# Altium PCB DUTBoard_DONT_TOUCH.PcbDoc (part 3 of 5)
Units mil, origin at the board's own origin, x right, y up, seen from the top; angles counter-clockwise.
Board outline 5475 x 5475 mil, 4 copper layers (Top Layer, Mid-Layer 1, Mid-Layer 2, Bottom Layer); 57 components, 471 nets, 1641 pads, 1070 vias.
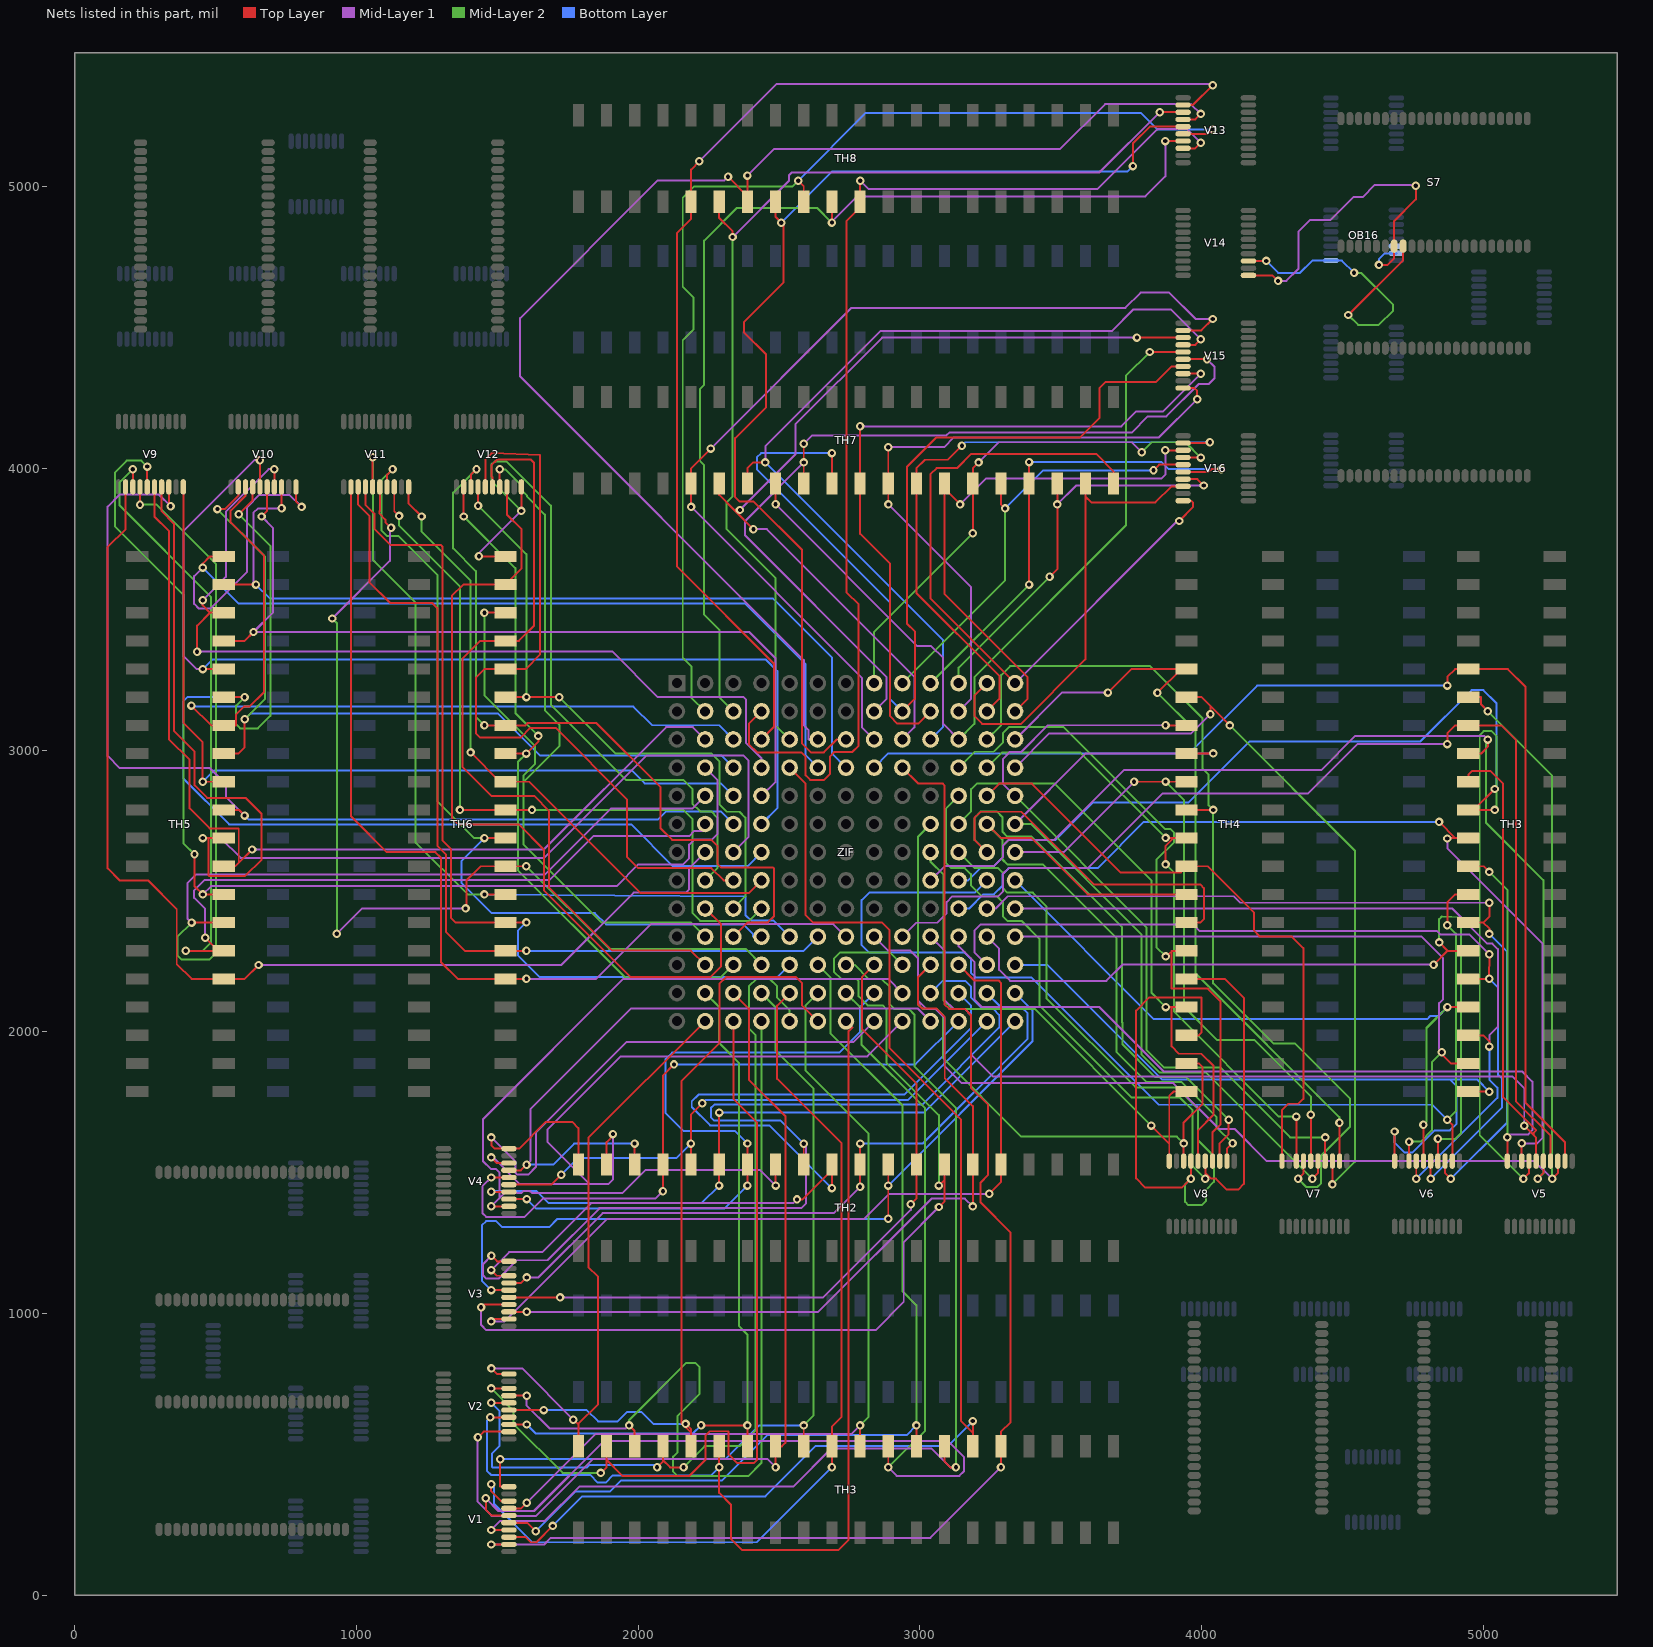
[diagram p5: the nets of this part, all layers, seen from the top]

## Via types
v1: diameter 30, hole 15, Top Layer to Bottom Layer, 1070 vias

## Nets (pads, with @x,y where several pads share a name; then routed paths per layer and width w, separated by ;. In a path a pad name is that pad's centre, name@x,y a point inside that pad or via, vN(x,y) a via of type N, cw(c..) or ccw(c..) an arc to the next point about the centre after c; other vN are vias at no path point) (continued)
INSIDE_B9: TH8.31 V13.IVCC1 ZIF.10 | length 4145.6
  Top Layer w7: ZIF.10@2437.5,3137.5 2393,3093 2393,3021 2422.5,2991.5 2579.09,2991.5 2594,2976.59 2594,2910.47 2610.47,2894 2659.53,2894 2681,2915.47 2681,2977.94 2696.06,2993 2759,2993 2782,3016 2782,3517 2740,3559 2740,4878.5 2787.5,4926 TH8.31@2787.5,4946.46 2787.5,5020.5 v1(2788,5021) ; V13.IVCC1@3933.86,5136.02 3977.02,5136.02 v1(3997,5156)
  Mid-Layer 1 w7: v1(2788,5021) 2818,4991 3629.5,4991 3842.5,5204 3949,5204 v1(3997,5156)
INSIDE_B10: TH8.30 V13.IVCC2 ZIF.11 | length 3764.8
  Top Layer w7: v1(2687.5,4872.09) TH8.30@2687.5,4946.46 ; v1(3871,5161.61) V13.IVCC2@3933.86,5161.61
  Mid-Layer 1 w7: v1(2687.5,4872.09) 2687.5,4875.5 2776.93,4964.93 3800,4964.93 3871,5035.93 v1(3871,5161.61)
  Mid-Layer 2 w7: ZIF.11@2337.5,3137.5 2288,3187 2288,3427 2234,3481 2234,4010.41 2219.35,4025.06 2219.35,4282.41 2234,4297.07 2234,4808 2350,4924 2635.59,4924 v1(2687.5,4872.09)
INSIDE_B11: TH8.29 V13.IVCC3 ZIF.12 | length 4112
  Top Layer w7: v1(2568,5021) 2587.5,5001.5 TH8.29@2587.5,4946.46 ; V13.IVCC3@3933.86,5187.2 4023.2,5187.2 v1(4039,5203)
  Mid-Layer 2 w7: ZIF.12@2237.5,3137.5 2189,3186 2189,3297 2158,3328 2158,4454 2197,4493 2197,4605 2158,4644 2158,4960 2199,5001 2548,5001 v1(2568,5021)
  Bottom Layer w7: v1(2568,5021) 2808.3,5261.3 3784.5,5261.3 3842.8,5203 v1(4039,5203)
INSIDE_B12: TH8.28 V13.IVCC4 ZIF.13 | length 4000.6
  Top Layer w7: TH8.28@2487.5,4946.46 2487.5,4892 v1(2507.5,4872) 2516,4863.5 2516,4660 2376,4520 2376,4482 2454,4404 2454,4217 2344,4107 2344,3898 2360,3882 2410,3882 2582,3710 2582,3023 2613,2992 2659,2992 2704.5,3037.5 ZIF.13@2737.5,3037.5 ; v1(3756,5073) 3756,5153 3815.8,5212.8 V13.IVCC4@3933.86,5212.8
  Bottom Layer w7: v1(2507.5,4872) 2689.5,5054 3737,5054 v1(3756,5073)
INSIDE_B13: TH8.27 V13.IVCC5 ZIF.14 | length 4888.7
  Top Layer w7: v1(2318.75,5034.75) TH8.27@2387.5,4966 ; TH8.27@2387.5,4946.46 TH8.27@2387.5,4966 ; v1(2387.5,5039) TH8.27@2387.5,4966 ; V13.IVCC5@3933.86,5238.39 3977.39,5238.39 v1(3997,5258)
  Mid-Layer 1 w7: v1(2318.75,5034.75) 2305.84,5021.84 2069.45,5021.84 1581.07,4533.46 1581.07,4325.93 2588,3319 2588,3088 2604,3072 2604,3037.5 ZIF.14@2637.5,3037.5 ; v1(2387.5,5039) 2481.5,5133 3497,5133 3657,5293 3962,5293 v1(3997,5258)
INSIDE_B14: TH8.26 V13.IVCC6 ZIF.15 | length 3824.5
  Top Layer w7: TH8.26@2287.5,4946.46 2287.5,4888.5 2335,4841 v1(2335,4821) ; v1(3850.98,5263.98) V13.IVCC6@3933.86,5263.98
  Mid-Layer 1 w7: v1(2335,4821) 2535.14,5021.14 2535.14,5040 2545.14,5050 3637,5050 v1(3850.98,5263.98)
  Mid-Layer 2 w7: v1(2335,4821) 2335,3900.5 2312.5,3878 2312.5,3785.5 2488,3610 2488,3087 ZIF.15@2537.5,3037.5
INSIDE_B15: TH8.25 V13.IVCC7 ZIF.16 | length 4317.3
  Top Layer w7: v1(2217,5090) 2187.5,5060.5 TH8.25@2187.5,4946.46 2187.5,4885.5 2138,4836 2138,3651 2482,3307 2482,3082 ZIF.16@2437.5,3037.5 ; V13.IVCC7@3933.86,5289.57 3968.57,5289.57 v1(4039,5360)
  Mid-Layer 1 w7: v1(2217,5090) 2490.66,5363.66 4035.34,5363.66 v1(4039,5360)
INSIDE_B16: TH7.40 V16.IVCC0 ZIF.17 | length 2558.4
  Top Layer w7: ZIF.17@3337.5,3237.5 3038,3537 3038,3980 3059,4001 3131.5,4001 3181.5,4051 3625,4051 3687.5,3988.5 TH7.40@3687.5,3946.46 ; v1(3920,3813) 3970,3863 3970,3877 3962.16,3884.84 V16.IVCC0@3933.86,3884.84
  Mid-Layer 1 w7: ZIF.17@3337.5,3237.5 3913,3813 v1(3920,3813)
INSIDE_B17: TH7.39 V16.IVCC1 ZIF.18 | length 1638.5
  Top Layer w7: ZIF.18@3237.5,3237.5 3194,3194 3194,3120 3221,3093 3359,3093 3587.5,3321.5 3587.5,3900 ; TH7.39@3587.5,3946.46 3587.5,3900 ; V16.IVCC1@3933.86,3936.02 3893,3936.02 3835.98,3879 3608.5,3879 3587.5,3900
INSIDE_B18: TH7.38 V16.IVCC2 ZIF.19 | length 1483.7
  Top Layer w7: v1(3460,3615) 3487.5,3642.5 v1(3487.5,3872) TH7.38@3487.5,3946.46 ; V16.IVCC2@3933.86,3961.61 3984.39,3961.61 v1(4007,3939)
  Mid-Layer 1 w7: v1(3487.5,3872) 3554.5,3939 v1(4007,3939)
  Mid-Layer 2 w7: ZIF.19@3137.5,3237.5 3137.5,3292.5 v1(3460,3615)
INSIDE_B19: TH7.37 V16.IVCC3 ZIF.20 | length 1762.5
  Top Layer w7: v1(3387.5,3587.5) TH7.37@3387.5,3946.46 v1(3387.5,4022) ; V16.IVCC3@3933.86,3987.2 4025,3987.2 4034.8,3997 v1(4070,3997)
  Mid-Layer 2 w7: ZIF.20@3037.5,3237.5 v1(3387.5,3587.5)
  Bottom Layer w7: v1(3387.5,4022) 3858,4022 3883,3997 v1(4070,3997)
INSIDE_B20: TH7.36 V16.IVCC4 ZIF.21 | length 1562.1
  Top Layer w7: TH7.36@3287.5,3946.46 3287.5,3872 v1(3302,3857.5) ; v1(3829,3993) 3848.8,4012.8 V16.IVCC4@3933.86,4012.8
  Mid-Layer 2 w7: ZIF.21@2937.5,3237.5 3302,3602 v1(3302,3857.5)
  Bottom Layer w7: v1(3302,3857.5) 3437.5,3993 v1(3829,3993)
INSIDE_B21: TH7.35 V16.IVCC5 ZIF.22 | length 1870.9
  Top Layer w7: v1(3187.5,3769.5) TH7.35@3187.5,3946.46 3187.5,4000.5 v1(3208,4021) ; V16.IVCC5@3933.86,4038.39 3996.61,4038.39 v1(3997,4038)
  Mid-Layer 1 w7: v1(3208,4021) 3279.5,4092.5 3751.5,4092.5 v1(3787,4057)
  Mid-Layer 2 w7: ZIF.22@2837.5,3237.5 2837.5,3419.5 v1(3187.5,3769.5) ; v1(3787,4057) 3822.5,4092.5 3942.5,4092.5 v1(3997,4038)
INSIDE_B22: TH7.34 V16.IVCC6 ZIF.23 | length 1947.7
  Top Layer w7: TH7.34@3087.5,3946.46 TH7.34@3087.5,3927 ; v1(3142.5,3872) TH7.34@3087.5,3927 ; ZIF.23@3337.5,3137.5 3381,3181 3381,3259.53 3087.5,3553.03 TH7.34@3087.5,3927 ; v1(3871,4064) V16.IVCC6@3933.86,4063.98
  Mid-Layer 1 w7: v1(3142.5,3872) 3234.8,3964.3 3857.48,3964.3 3871,3977.82 v1(3871,4064)
INSIDE_B23: TH7.33 V16.IVCC7 ZIF.24 | length 2180
  Top Layer w7: v1(3149,4080) 3099.46,4030.46 3017.96,4030.46 2987.5,4000 TH7.33@2987.5,3946.46 2987.5,3557.5 3282,3263 3282,3182 ZIF.24@3237.5,3137.5 ; V16.IVCC7@3933.86,4089.57 4026.5,4089.57 v1(4029.43,4092.5)
  Bottom Layer w7: v1(3149,4080) 3161.5,4092.5 v1(4029.43,4092.5)
INSIDE_B24: TH7.32 V15.IVCC0 ZIF.25 | length 2329.1
  Top Layer w7: v1(2887.5,4075) TH7.32@2887.5,3946.46 2887.5,3872.5 v1(2888,3872) ; V15.IVCC0@3933.86,4284.84 3974.16,4284.84 3984,4275 v1(3984,4245)
  Mid-Layer 1 w7: v1(2887.5,4075) 3086,4075 3120.5,4109.5 3848.5,4109.5 v1(3984,4245) ; v1(2888,3872) 3182,3578 3182,3182 ZIF.25@3137.5,3137.5
INSIDE_B25: TH7.31 V15.IVCC1 ZIF.26 | length 2595.5
  Top Layer w7: v1(2787.5,4149) TH7.31@2787.5,3946.46 2787.5,3767 2894,3660.5 2894,3120 2920,3094 2994,3094 ZIF.26@3037.5,3137.5 ; V15.IVCC1@3933.86,4336.02 v1(3997,4336)
  Mid-Layer 1 w7: v1(2787.5,4149) 3715,4149 3768,4202 3863,4202 v1(3997,4336)
INSIDE_B26: TH7.30 V15.IVCC2 ZIF.27 | length 3583.5
  Top Layer w7: TH7.30@2687.5,3946.46 v1(2687.5,4054) ; ZIF.27@2937.5,3137.5 2982,3182 2982,3421 2954,3449 2954,4006 3057,4109 3568,4109 3637,4178 3637,4284 3660,4307 3838.39,4307 3893,4361.61 V15.IVCC2@3933.86,4361.61
  Bottom Layer w7: v1(2687.5,4054) 2436,4054 2421,4039 2421,3996 2894,3523 2894,3181 ZIF.27@2937.5,3137.5
INSIDE_B27: TH7.29 V15.IVCC3 ZIF.28 | length 3053.8
  Top Layer w7: TH7.29@2587.5,3946.46 v1(2587.5,4021) v1(2587.5,4087) ; V15.IVCC3@3933.86,4387.2 v1(4018.8,4387.2)
  Mid-Layer 1 w7: v1(2587.5,4021) 2379,3812.5 2379,3762 2881,3260 2881,3181 ZIF.28@2837.5,3137.5 ; v1(2587.5,4087) 2617.5,4117 3094,4117 3104,4127 3751.23,4127 3808.73,4184.5 3875,4184.5 3989.79,4299.29 4024.29,4299.29 4045.5,4320.5 4045.5,4360.5 v1(4018.8,4387.2)
INSIDE_B28: TH7.28 V15.IVCC4 ZIF.29 | length 2981.5
  Top Layer w7: v1(2487.5,3872.09) TH7.28@2487.5,3946.46 ; v1(3815.8,4412.8) V15.IVCC4@3933.86,4412.8
  Mid-Layer 1 w7: v1(2487.5,3872.09) 2990.59,3369 3040,3369 3082,3327 3082,3093 ZIF.29@3137.5,3037.5
  Mid-Layer 2 w7: ZIF.29@3137.5,3037.5 3193,3093 3193,3259 3731,3797 3731,4328 v1(3815.8,4412.8)
INSIDE_B29: TH7.27 V15.IVCC5 ZIF.30 | length 3308.5
  Top Layer w7: TH7.27@2387.5,3946.46 2387.5,4000 2408.5,4021 v1(2451,4021) ; V15.IVCC5@3933.86,4438.39 3977.39,4438.39 v1(3997,4458)
  Mid-Layer 1 w7: v1(2451,4021) 2451,4078 2861,4488 3682,4488 3758,4564 3891,4564 v1(3997,4458)
  Bottom Layer w7: v1(2451,4021) 3082,3390 3082,3082 ZIF.30@3037.5,3037.5
INSIDE_B30: TH7.26 V15.IVCC6 ZIF.31 | length 3150.7
  Top Layer w7: TH7.26@2287.5,3946.46 2287.5,3905.5 2341,3852 ; v1(2361,3852) 2341,3852 ; v1(2409,3784) 2341,3852 ; v1(3770,4464) 3871,4464 V15.IVCC6@3933.86,4463.98
  Mid-Layer 1 w7: v1(2361,3852) 2558,4049 2558,4156 2866,4464 v1(3770,4464) ; v1(2409,3784) 2456.53,3784 2980.53,3260 2980.53,3080.53 ZIF.31@2937.5,3037.5
INSIDE_B31: TH7.25 V15.IVCC7 ZIF.32 | length 3502.3
  Top Layer w7: v1(2187.5,3863) TH7.25@2187.5,3946.46 2187.5,4000 v1(2257.5,4070) ; V15.IVCC7@3933.86,4489.57 3998.57,4489.57 v1(4039,4530)
  Mid-Layer 1 w7: v1(2187.5,3863) 2794,3256.5 2794,3081 ZIF.32@2837.5,3037.5 ; v1(2257.5,4070) 2757,4569.5 3729.5,4569.5 3783.66,4623.66 3884.5,4623.66 3978.16,4530 v1(4039,4530)
INSIDE_B32: TH6.40 V12.IVCC0 ZIF.33 | length 2627.6
  Top Layer w7: v1(1434.5,3687.5) TH6.40@1528.54,3687.5 ; v1(1585.16,3848.98) V12.IVCC0@1585.16,3933.86
  Mid-Layer 1 w7: v1(1434.5,3687.5) 1434.5,3698.32 v1(1585.16,3848.98)
  Mid-Layer 2 w7: v1(1585.16,3848.98) 1479,3955.14 1479,4014 1490,4025 1532.25,4025 1690,3867.25 1690,3160 1957,2893 2161,2893 2192,2862 2192,2810 2220,2782 2259,2782 2281,2760 2281,2581 ZIF.33@2237.5,2537.5
INSIDE_B33: TH6.39 V12.IVCC1 ZIF.34 | length 2905
  Top Layer w7: V12.IVCC1@1533.98,3933.86 1533.98,3836.02 1586,3784 1586,3644.96 TH6.39@1528.54,3587.5 1379,3587.5 1338.5,3547 1338.5,2759 1361.5,2736 1576,2736 1665,2647 1665,2502 1973,2194 2254.85,2194 2294,2233.15 2294,2381 ZIF.34@2237.5,2437.5
INSIDE_B34: TH6.38 V12.IVCC2 ZIF.35 | length 3094.9
  Top Layer w7: v1(1454,3487) 1454.5,3487.5 TH6.38@1528.54,3487.5 ; V12.IVCC2@1508.39,3933.86 v1(1508.39,3996.42)
  Mid-Layer 2 w7: v1(1454,3487) 1454,3194 1633,3015 1633,2950 1592,2909 1592,2885.5 ; v1(1508.39,3996.42) 1528.39,3996.42 1590,3934.8 1590,3918.63 1604.43,3904.2 1604.43,3900.37 1669,3835.8 1669,3140.74 1720,3089.74 1720,3013.5 1592,2885.5 ; ZIF.35@2237.5,2337.5 2187,2388 1869,2388 1592,2665 1592,2885.5
INSIDE_B35: TH6.37 V12.IVCC3 ZIF.36 | length 2818.7
  Top Layer w7: V12.IVCC3@1482.8,3933.86 1482.8,3967.92 1479,3971.71 1479,4010.26 1500,4031.26 1617.74,4031.26 1630,4019 1630,3441.5 1576,3387.5 TH6.37@1528.54,3387.5 1440,3387.5 1376,3323.5 1376,2940 1479,2837 1630.5,2837 1684,2783.5 1684,2511 1907,2288 2187,2288 ZIF.36@2237.5,2237.5
INSIDE_B36: TH6.36 V12.IVCC4 ZIF.37 | length 2747.9
  Top Layer w7: V12.IVCC4@1457.2,3933.86 1457.2,4031.7 1479.5,4054 1652,4048 1652,3339.5 1600,3287.5 TH6.36@1528.54,3287.5 1454.17,3287.5 1424,3257.33 1424,3060 1440,3044 1582.5,3044 1617,3078.5 1706.5,3078.5 1960,2825 1960,2621 2000,2581 2259.53,2581 2303.03,2537.5 ZIF.37@2337.5,2537.5
INSIDE_B37: TH6.35 V12.IVCC5 ZIF.38 | length 2276.3
  Top Layer w7: v1(1431.61,3867) V12.IVCC5@1431.61,3933.86 ; TH6.35@1528.54,3187.5 v1@1603,3187.5 ; v1(1603,3188) v1@1603,3187.5 ; v1(1719.59,3187.5) v1@1603,3187.5
  Mid-Layer 2 w7: v1(1431.61,3867) 1603,3695.61 v1(1603,3188) ; v1(1719.59,3187.5) 1919.09,2988 2260,2988 2288,2960 2288,2807.06 2314.06,2781 2359.53,2781 2380.53,2760 2380.53,2480.53 ZIF.38@2337.5,2437.5
INSIDE_B38: TH6.34 V12.IVCC6 ZIF.39 | length 2772.9
  Top Layer w7: V12.IVCC6@1406.02,3933.86 1406.02,3977.02 v1(1426,3997) ; v1(1454,3088) 1454.5,3087.5 TH6.34@1528.54,3087.5 1600,3087.5 1608.5,3096 1851,3096 2079.53,2867.47 2079.53,2721.47 2120,2681 2259.53,2681 2281,2659.53 2281,2597.06 2295.06,2583 2479,2583 2482,2580 2482,2410 2460,2388 2388,2388 ZIF.39@2337.5,2337.5
  Mid-Layer 2 w7: v1(1426,3997) 1343,3914 1343,3716 1424,3635 1424,3118 v1(1454,3088)
INSIDE_B39: TH6.33 V12.IVCC7 ZIF.40 | length 2515.4
  Top Layer w7: v1(1380.43,3829) V12.IVCC7@1380.43,3933.86 ; TH6.33@1528.54,2987.5 v1(1602.91,2987.5) 1645.5,3030.09 v1(1645.5,3050)
  Mid-Layer 2 w7: v1(1380.43,3829) 1564,3645.43 1564,3131.5 v1(1645.5,3050) ; v1(1602.91,2987.5) 1573,2957.59 1573,2573 1953,2193 2293,2193 ZIF.40@2337.5,2237.5
INSIDE_B40: TH6.32 V11.IVCC0 ZIF.41 | length 2291.7
  Top Layer w7: V11.IVCC0@1185.16,3933.86 1185.16,3874.84 v1(1231,3829) ; v1(1405,2991.5) 1509,2887.5 TH6.32@1528.54,2887.5 1614,2887.5 2009.5,2492 2392,2492 ZIF.41@2437.5,2537.5
  Mid-Layer 2 w7: v1(1231,3829) 1231,3775 1405,3601 v1(1405,2991.5)
INSIDE_B41: TH6.31 V11.IVCC1 ZIF.42 | length 2690
  Top Layer w7: V11.IVCC1@1133.98,3933.86 1133.98,3848.32 v1(1151.3,3831) ; v1(1367,2787.5) TH6.31@1528.54,2787.5 v1(1623,2787.5)
  Mid-Layer 2 w7: v1(1151.3,3831) 1151.3,3796.7 1367,3581 v1(1367,2787.5) ; v1(1623,2787.5) 2160.5,2787.5 2193,2755 2193,2421 2220,2394 2394,2394 ZIF.42@2437.5,2437.5
INSIDE_B42: TH6.30 V11.IVCC2 ZIF.43 | length 3011.3
  Top Layer w7: V11.IVCC2@1108.39,3933.86 1108.39,3977.39 v1(1128,3997) ; v1(1454.17,2687.5) TH6.30@1528.54,2687.5
  Mid-Layer 2 w7: v1(1128,3997) 1088,3957 1088,3780 1109,3759 1150,3759 1288,3621 1288,2817 1417.5,2687.5 v1(1454.17,2687.5)
  Bottom Layer w7: v1(1454.17,2687.5) 1372,2605.33 1372,2529 1480,2421 1846,2421 1886,2381 2373.08,2381 2408,2346.08 2408,2337.5 ZIF.43@2437.5,2337.5
INSIDE_B43: TH6.29 V11.IVCC3 ZIF.44 | length 3507.1
  Top Layer w7: V11.IVCC3@1082.8,3933.86 1082.8,3848.98 1080.73,3846.91 1080.73,3840 1102.8,3817.94 1102.8,3808.98 v1(1122.8,3788.98) ; v1@1390,2435 1390,2537 1440.5,2587.5 TH6.29@1528.54,2587.5 v1(1602.91,2587.5)
  Mid-Layer 1 w7: v1(914,3467) 1118.5,3671.5 1118.5,3784.68 v1(1122.8,3788.98) ; v1(930,2348) 1019.7,2437.7 v1(1387.3,2437.7)
  Mid-Layer 2 w7: v1(914,3467) 930,3451 v1(930,2348) ; v1(1602.91,2587.5) 1896.41,2294 2381,2294 ZIF.44@2437.5,2237.5
INSIDE_B44: TH6.28 V11.IVCC4 ZIF.45 | length 3111.7
  Top Layer w7: V11.IVCC4@1057.2,3933.86 1057.2,4038.29 v1(1057.91,4039) ; v1(1454.17,2487.5) TH6.28@1528.54,2487.5
  Mid-Layer 2 w7: v1(1057.91,4039) 1057.91,3675.09 1209,3524 1209,2673 1394.5,2487.5 v1(1454.17,2487.5)
  Bottom Layer w7: v1(1454.17,2487.5) 2380.53,2480.53 2380.53,2414.53 2400.58,2394.47 2480.53,2394.47 ZIF.45@2537.5,2337.5
INSIDE_B45: TH6.27 V11.IVCC5 ZIF.46 | length 3179
  Top Layer w7: V11.IVCC5@1031.61,3933.86 1031.61,3871 1063.73,3838.88 1063.73,3784.73 1120.46,3728 1299,3728 1304.5,3722.5 1304.5,2679.5 1335,2649 1335,2404 1351.5,2387.5 TH6.27@1528.54,2387.5 1602.5,2387.5 v1(1603,2388)
  Bottom Layer w7: v1(1603,2388) 1573,2358 1573,2271 1650,2194 2494,2194 ZIF.46@2537.5,2237.5
INSIDE_B46: TH6.26 V11.IVCC6 ZIF.47 | length 3164.4
  Top Layer w7: V11.IVCC6@1006.02,3933.86 1006.02,3870.98 1046,3831 1046,3595 1119,3522 1269,3522 1287,3504 1287,2660 1317.5,2629.5 1317.5,2355 1385,2287.5 TH6.26@1528.54,2287.5 v1(1603,2287.5)
  Bottom Layer w7: v1(1603,2287.5) 2587.5,2287.5 ZIF.47@2637.5,2337.5
INSIDE_B47: TH6.25 V11.IVCC7 ZIF.48 | length 3481.7
  Top Layer w7: V11.IVCC7@980.43,3933.86 980.43,2764.57 1107,2638 1280,2638 1300,2618 1300,2247 1359.5,2187.5 TH6.25@1528.54,2187.5 1602.5,2187.5 v1(1603,2188)
  Mid-Layer 1 w7: v1(1603,2188) 1851,2188 2045,2382 2693,2382 ZIF.48@2737.5,2337.5
INSIDE_B48: TH5.40 V10.IVCC0 ZIF.49 | length 3694.2
  Top Layer w7: v1(454.17,3647.5) 454.17,3661.67 480,3687.5 TH5.40@528.54,3687.5 ; V10.IVCC0@785.16,3933.86 785.16,3882.84 v1(805.16,3862.84)
  Mid-Layer 1 w7: v1(454.17,3647.5) 424,3617.33 424,3519 441,3502 480.36,3502 612,3633.64 612,3862.64 655.27,3905.91 762.09,3905.91 v1(805.16,3862.84)
  Bottom Layer w7: v1(454.17,3647.5) 580.67,3521 2378,3521 2594,3305 2594,2981 ZIF.49@2637.5,2937.5
INSIDE_B49: TH5.39 V10.IVCC1 ZIF.50 | length 3118
  Top Layer w7: TH5.39@528.54,3587.5 v1(642.91,3587.5) ; v1(733.98,3858) V10.IVCC1@733.98,3933.86
  Mid-Layer 1 w7: v1(642.91,3587.5) 634,3596.41 634,3841.5 650.5,3858 v1(733.98,3858)
  Bottom Layer w7: v1(642.91,3587.5) 692.41,3538 2477.41,3538 2688,3327.41 2688,2987 ZIF.50@2737.5,2937.5
INSIDE_B50: TH5.38 V10.IVCC2 ZIF.51 | length 3190.1
  Top Layer w7: v1(434,3349) 434,3441.5 480,3487.5 ; v1(454,3532) 454,3513.5 480,3487.5 ; TH5.38@528.54,3487.5 480,3487.5 ; v1(708,3997) 708.39,3996.61 V10.IVCC2@708.39,3933.86
  Mid-Layer 1 w7: v1(434,3349) 1909,3349 2070,3188 2374,3188 2382,3180 2382,3026 2437.5,2970.5 ZIF.51@2437.5,2937.5 ; v1(454,3532) 536.5,3614.5 536.5,3845.5 688,3997 v1(708,3997)
INSIDE_B51: TH5.37 V10.IVCC3 ZIF.52 | length 3087.9
  Top Layer w7: TH5.37@528.54,3387.5 577.91,3387.5 602.91,3387.5 v1(634.41,3419) ; v1(663,3829) 682.8,3848.8 V10.IVCC3@682.8,3933.86
  Mid-Layer 1 w7: v1(663,3829) 703,3789 703,3487.59 v1(634.41,3419) 2394,3419 2488,3325 2488,2888 ZIF.52@2437.5,2837.5
INSIDE_B52: TH5.36 V10.IVCC4 ZIF.53 | length 3713
  Top Layer w7: v1(454.17,3287.5) TH5.36@528.54,3287.5 ; V10.IVCC4@657.2,3933.86 v1(657.2,4029)
  Mid-Layer 1 w7: v1(454.17,3287.5) 433,3287.5 385.5,3335 385.5,3777.36 637.14,4029 v1(657.2,4029)
  Bottom Layer w7: v1(454.17,3287.5) 487.67,3321 2453.47,3321 2494,3280.47 2494,2794 ZIF.53@2437.5,2737.5
INSIDE_B53: TH5.35 V10.IVCC5 ZIF.54 | length 3907.5
  Top Layer w7: TH5.35@528.54,3187.5 v1(602.91,3187.5) ; v1(582,3837) 631.61,3886.61 V10.IVCC5@631.61,3933.86
  Mid-Layer 2 w7: v1(582,3837) 694,3725 694,3121 650,3077 587,3077 573,3091 573,3157.59 v1(602.91,3187.5)
  Bottom Layer w7: v1(602.91,3187.5) 400,3187.5 385,3172.5 385,2899 548,2736 1975,2736 2123,2588 2388,2588 ZIF.54@2437.5,2637.5
INSIDE_B54: TH5.34 V10.IVCC6 ZIF.55 | length 3131
  Top Layer w7: v1(414,3158) 484.5,3087.5 TH5.34@528.54,3087.5 572,3087.5 572,3126 600,3154 620,3154 672,3206 672,3690 553.5,3808.5 553.5,3850 606.02,3902.52 V10.IVCC6@606.02,3933.86
  Bottom Layer w7: v1(414,3158) 418,3154 1983,3154 2049,3088 2287,3088 ZIF.55@2337.5,3037.5
INSIDE_B55: TH5.33 V10.IVCC7 ZIF.56 | length 2975.2
  Top Layer w7: v1(506.5,3855.5) 533,3855.5 580.43,3902.93 V10.IVCC7@580.43,3933.86 ; TH5.33@528.54,2987.5 580,2987.5 603,3010.5 v1(603,3109)
  Mid-Layer 2 w7: v1(506.5,3855.5) 675,3687 675,3181 v1(603,3109)
  Bottom Layer w7: v1(603,3109) 623,3129 1503,3129 1651,2981 2294,2981 ZIF.56@2337.5,2937.5
INSIDE_B56: TH5.32 V9.IVCC0 ZIF.57 | length 3086.1
  Top Layer w7: V9.IVCC0@385.16,3933.86 385.16,3096.84 454.17,3027.83 v1(454.17,2887.5) TH5.32@528.54,2887.5
  Bottom Layer w7: v1(454.17,2887.5) 493.67,2927 1978,2927 2023,2882 2293,2882 ZIF.57@2337.5,2837.5
INSIDE_B57: TH5.31 V9.IVCC1 ZIF.58 | length 3668.5
  Top Layer w7: V9.IVCC1@333.98,3933.86 333.98,3871.02 v1(340,3865) ; TH5.31@528.54,2787.5 582.91,2787.5 v1(602.91,2767.5)
  Mid-Layer 1 w7: v1(340,3865) 298,3907 160,3907 117,3864 117,2979 160,2936 480,2936 536,2880 536,2834.41 v1(602.91,2767.5)
  Bottom Layer w7: v1(602.91,2767.5) 617.41,2753 2070,2753 2099,2782 2293,2782 ZIF.58@2337.5,2737.5
INSIDE_B58: TH5.30 V9.IVCC2 ZIF.59 | length 4442.5
  Top Layer w7: V9.IVCC2@308.39,3933.86 308.39,3847.61 352,3804 352,3067.88 425.67,2994.21 425.67,2874.33 470,2830 606,2830 663,2773 663,2611 605,2553 476,2553 475,2554 475,2687.5 ; v1(454.17,2687.5) 475,2687.5 ; TH5.30@528.54,2687.5 475,2687.5
  Mid-Layer 1 w7: v1(454.17,2687.5) 517.97,2687.5 588.47,2617 1666,2617 2030,2981 2373,2981 2392,2962 2392,2692 ZIF.59@2337.5,2637.5
INSIDE_B59: TH5.29 V9.IVCC3 ZIF.60 | length 3449.4
  Top Layer w7: V9.IVCC3@282.8,3933.86 282.8,3829 334,3777.8 334,3039 408,2965 408,2793 479,2722 581,2722 582,2721 582,2599.5 ; TH5.29@528.54,2587.5 570,2587.5 582,2599.5 ; v1(629.5,2647) 582,2599.5
  Mid-Layer 1 w7: v1(629.5,2647) 1664.88,2647 2098.88,3081 2194,3081 ZIF.60@2237.5,3037.5
INSIDE_B60: TH5.28 V9.IVCC4 ZIF.61 | length 4113.3
  Top Layer w7: V9.IVCC4@257.2,3933.86 v1(257.2,4006) ; v1(425,2630) 425,2516.67 v1(454.17,2487.5) TH5.28@528.54,2487.5
  Mid-Layer 1 w7: v1(454.17,2487.5) 483.67,2517 1923,2517 2000,2594 2159.53,2594 2181,2615.47 2181,2664.47 2198.53,2682 2261,2682 2282,2703 2282,2893 ZIF.61@2237.5,2937.5
  Mid-Layer 2 w7: v1(257.2,4006) 236.2,4027 184,4027 142,3985 142,3794 385.5,3550.5 385.5,2669.5 v1(425,2630)
INSIDE_B61: TH5.27 V9.IVCC5 ZIF.62 | length 4317.6
  Top Layer w7: v1(231.61,3871) V9.IVCC5@231.61,3933.86 ; v1(414.5,2387.5) TH5.27@528.54,2387.5
  Mid-Layer 1 w7: v1(414.5,2387.5) 400,2402 400,2528 430,2558 1669,2558 1903.24,2792.24 2192.24,2792.24 ZIF.62@2237.5,2837.5
  Mid-Layer 2 w7: v1(231.61,3871) 291,3871 502,3660 502,2280 479,2257 378,2257 364,2271 364,2337 v1(414.5,2387.5)
INSIDE_B62: TH5.26 V9.IVCC6 ZIF.63 | length 4308.6
  Top Layer w7: V9.IVCC6@206.02,3933.86 v1(206.02,3997) ; v1(394.17,2287.5) TH5.26@509,2287.5 ; v1(463,2333.5) TH5.26@509,2287.5 ; TH5.26@528.54,2287.5 TH5.26@509,2287.5
  Mid-Layer 1 w7: v1(463,2333.5) 463,2436 424,2475 424,2502 460,2538 1684,2538 1840.47,2694.47 2181,2694.47 2199.53,2713 2237.5,2713 ZIF.63@2237.5,2737.5
  Mid-Layer 2 w7: v1(206.02,3997) 159,3949.98 159,3867.98 484,3542.98 484,2317.33 454.17,2287.5 v1(394.17,2287.5)
INSIDE_B63: TH5.25 V9.IVCC7 ZIF.64 | length 4008.1
  Top Layer w7: V9.IVCC7@180.43,3933.86 180.43,3784.43 117,3721 117,2580 160,2537 260,2537 362,2435 362,2240 414.5,2187.5 TH5.25@528.54,2187.5 603,2187.5 v1(652.5,2237)
  Mid-Layer 1 w7: v1(652.5,2237) 1727,2237 1984,2494 2169.53,2494 2181,2505.47 2181,2581 ZIF.64@2237.5,2637.5
INSIDE_B64: TH4.40 V8.IVCC0 ZIF.65 | length 1856.1
  Top Layer w7: v1(3820.84,1667) 3884.84,1603 ; V8.IVCC0@3884.84,1541.14 3884.84,1603 ; TH4.40@3946.46,1787.5 3900,1787.5 3884.84,1772.34 3884.84,1603
  Mid-Layer 2 w7: ZIF.65@3037.5,2637.5 3037.5,2604 3083,2558.5 3083,2112.06 3114.06,2081 3406.84,2081 v1(3820.84,1667)
INSIDE_B65: TH4.39 V8.IVCC1 ZIF.66 | length 2317.8
  Top Layer w7: V8.IVCC1@3936.02,1541.14 3936.02,1578.7 v1(3936.02,1603.7) 3936.02,1678.02 4003,1745 4003,1874.5 3990,1887.5 TH4.39@3946.46,1887.5
  Mid-Layer 2 w7: ZIF.66@3037.5,2737.5 2993,2693 2993,2098.53 3010.53,2081 3059.53,2081 3081,2059.53 3081,1907 3360,1628 3911.73,1628 v1(3936.02,1603.7)
INSIDE_B66: TH4.38 V8.IVCC2 ZIF.67 | length 3299.5
  Top Layer w7: TH4.38@3946.46,1987.5 3990,1987.5 4000,1997.5 4000,2121 3999,2122 3814,2122 3767,2075 3767,1479.61 3800,1446.61 3929.65,1446.61 v1(3961.61,1478.58) V8.IVCC2@3961.61,1541.14
  Mid-Layer 2 w7: ZIF.67@3137.5,2637.5 3193,2582 3276.47,2582 3294,2564.47 3294,2510.47 3310.47,2494 3400.47,2494 3449,2445.47 3449,2119.25 3765.25,1803 3910.52,1803 3987,1726.52 3987,1615 4043,1559 4043,1466.85 4016,1439.85 4016,1400.5 4000.5,1385 3953,1385 3941.61,1396.39 3941.61,1458.58 v1(3961.61,1478.58)
INSIDE_B67: TH4.37 V8.IVCC3 ZIF.68 | length 2156.9
  Top Layer w7: v1(3872.09,2087.5) 3897.08,2087.5 ; TH4.37@3946.46,2087.5 3897.08,2087.5 ; V8.IVCC3@3987.2,1541.14 3987.2,1650.2 4042,1705 4042,1879 3999,1922 3919,1922 3893,1948 3893,2083.42 3897.08,2087.5
  Mid-Layer 2 w7: ZIF.68@3137.5,2737.5 3182,2782 3182,2861 3203,2882 3476,2882 3822,2536 3822,2137.59 v1(3872.09,2087.5)
INSIDE_B68: TH4.36 V8.IVCC4 ZIF.69 | length 3072.5
  Top Layer w7: TH4.36@3946.46,2187.5 4082.5,2187.5 4150,2120 4150,1460 4130,1440 4089,1440 4050.42,1478.58 4034.21,1478.58 4012.8,1500 ; v1(4012.8,1478.58) 4012.8,1500 ; V8.IVCC4@4012.8,1541.14 4012.8,1500
  Mid-Layer 2 w7: ZIF.69@3137.5,2837.5 3093,2793 3093,2598.53 3110.53,2581 3159.53,2581 3181,2559.53 3181,2519.53 3219.53,2481 3273.47,2481 3294,2460.47 3294,2410.47 3310.47,2394 3360.47,2394 3424,2330.47 3424,2094 3752,1766 3923,1766 3968,1721 3968,1523.38 v1(4012.8,1478.58)
INSIDE_B69: TH4.35 V8.IVCC5 ZIF.70 | length 2462.9
  Top Layer w7: v1(3872.09,2267.5) 3893,2284.23 ; TH4.35@3946.46,2287.5 3897.09,2287.5 3893,2287.5 3893,2284.23 ; V8.IVCC5@4038.39,1541.14 4038.39,1643.11 4066,1670.73 4066,2109 4022,2153 3893,2154 3893,2284.23
  Mid-Layer 2 w7: ZIF.70@3137.5,2937.5 3194,2994 3262,2994 3294,3026 3294,3059.53 3316.47,3082 3508,3082 3871,2719 3890,2719 3902,2707 3902,2673 3839,2610 3839,2300.59 v1(3872.09,2267.5)
INSIDE_B70: TH4.34 V8.IVCC6 ZIF.71 | length 3190
  Top Layer w7: ZIF.71@3237.5,2637.5 3193,2682 3193,2759 3215,2781 3360,2781 3619,2522 3996,2522 4008,2510 4008,2400 3995.5,2387.5 TH4.34@3946.46,2387.5 ; V8.IVCC6@4063.98,1541.14 4063.98,1603.98 4096,1636 v1(4096,1688)
  Mid-Layer 2 w7: ZIF.71@3237.5,2637.5 3194,2681 3194,2759.53 3216.47,2782 3272,2782 3293,2761 3293,2710 3310,2693 3396,2693 3717,2372 3717,2034 3719,2032 3719,1956 3836,1839 3945,1839 v1(4096,1688)
INSIDE_B71: TH4.33 V8.IVCC7 ZIF.72 | length 2524
  Top Layer w7: ZIF.72@3237.5,2737.5 3287,2688 3395,2688 3595.5,2487.5 TH4.33@3946.46,2487.5 ; V8.IVCC7@4089.57,1541.14 4089.57,1584 v1(4109.57,1604)
  Mid-Layer 2 w7: ZIF.72@3237.5,2737.5 3293,2682 3293,2611.47 3310.47,2594 3435.19,2594 3698,2331.19 3698,1928.12 3805.12,1821 3929,1821 4052,1698 4052,1661.57 v1(4109.57,1604)
INSIDE_B72: TH4.32 V7.IVCC0 ZIF.73 | length 2261.2
  Top Layer w7: ZIF.73@3237.5,2837.5 3281,2881 3397.06,2881 3713.06,2565 3927,2565 3927,2587.5 TH4.32@3946.46,2587.5 4021.5,2587.5 4185,2424 4185,2360 4207,2338 4320,2338 4361,2297 4361,1762 4343.48,1744.48 4307.48,1744.48 4284.84,1721.84 V7.IVCC0@4284.84,1541.14
INSIDE_B73: TH4.31 V7.IVCC1 ZIF.74 | length 2242.8
  Top Layer w7: v1(3872,2594) 3872,2660 3899.5,2687.5 ; v1(3872,2688) 3872.5,2687.5 3899.5,2687.5 ; TH4.31@3946.46,2687.5 3899.5,2687.5 ; V7.IVCC1@4336.02,1541.14 v1(4336.02,1698.98)
  Mid-Layer 2 w7: ZIF.74@3237.5,2937.5 3290.83,2990.83 3569.17,2990.83 v1(3872,2688) ; v1(3872,2594) 3902,2564 3902,2071.33 4274.35,1698.98 v1(4336.02,1698.98)
INSIDE_B74: TH4.30 V7.IVCC2 ZIF.75 | length 3274
  Top Layer w7: TH4.30@3946.46,2787.5 v1(4040.83,2787.5) v1@4041,2787.33 ; v1(4342,1478) 4361.61,1497.61 V7.IVCC2@4361.61,1541.14
  Mid-Layer 2 w7: ZIF.75@3237.5,3037.5 3288,3088 3288,3266 3320,3298 3817,3298 4003,3112 4003,2934 4025,2912 4025,2803.33 4041,2787.33 4041,2172 4254,1959 4331,1959 4526,1764 4526,1662 4423,1559 4423,1461 4411,1449 4371,1449 v1(4342,1478)
INSIDE_B75: TH4.29 V7.IVCC3 ZIF.76 | length 2350.8
  Top Layer w7: v1(3760,2887.5) v1@3872.5,2887.5 ; v1(3872,2888) v1@3872.5,2887.5 ; TH4.29@3946.46,2887.5 v1@3872.5,2887.5 ; V7.IVCC3@4387.2,1541.14 v1(4387.2,1705.8)
  Mid-Layer 1 w7: ZIF.76@3337.5,2637.5 3510,2637.5 v1(3760,2887.5)
  Mid-Layer 2 w7: v1(3872,2888) 3938,2822 3938,2088 4056,1970 4188,1970 4387.2,1770.8 v1(4387.2,1705.8)
INSIDE_B76: TH4.28 V7.IVCC4 ZIF.77 | length 2800.3
  Top Layer w7: TH4.28@3946.46,2987.5 4040.5,2987.5 v1(4041,2988) ; v1(4393,1478) 4412.8,1497.8 V7.IVCC4@4412.8,1541.14
  Mid-Layer 1 w7: ZIF.77@3337.5,2737.5 3588,2988 v1(4041,2988)
  Mid-Layer 2 w7: ZIF.77@3337.5,2737.5 3394.67,2737.5 3787,2345.17 3787,1918.76 3849.76,1856 4015,1856 v1(4393,1478)
INSIDE_B77: TH4.27 V7.IVCC5 ZIF.78 | length 2792.6
  Top Layer w7: v1(3872,3088) 3872.5,3087.5 TH4.27@3946.46,3087.5 ; V7.IVCC5@4438.39,1541.14 v1(4438.39,1625.01)
  Mid-Layer 1 w7: ZIF.78@3337.5,2837.5 3294,2881 3294,2968 3319,2993 3359,2993 3454,3088 v1(3872,3088)
  Mid-Layer 2 w7: ZIF.78@3337.5,2837.5 3804,2371 3804,1936.13 3866.13,1874 4065.33,1874 4314.32,1625.01 v1(4438.39,1625.01)
INSIDE_B78: TH4.26 V7.IVCC6 ZIF.79 | length 2926.2
  Top Layer w7: TH4.26@3946.46,3187.5 4000,3187.5 4031,3156.5 ; v1(4031,3127) 4031,3156.5 ; v1(4100,3087.5) 4031,3156.5 ; v1(4463.98,1458) V7.IVCC6@4463.98,1541.14
  Mid-Layer 1 w7: ZIF.79@3337.5,2937.5 3459,3059 3963,3059 v1(4031,3127)
  Mid-Layer 2 w7: v1(4100,3087.5) 4544,2643.5 4544,1538.02 v1(4463.98,1458)
INSIDE_B79: TH4.25 V7.IVCC7 ZIF.80 | length 2761.5
  Top Layer w7: v1(3667,3204) 3750.5,3287.5 TH4.25@3927,3287.5 ; v1(3843,3203.5) TH4.25@3927,3287.5 ; TH4.25@3946.46,3287.5 TH4.25@3927,3287.5 ; v1(4489,1677) 4489.57,1676.43 V7.IVCC7@4489.57,1541.14
  Mid-Layer 1 w7: ZIF.80@3337.5,3037.5 3504,3204 v1(3667,3204)
  Mid-Layer 2 w7: v1(3843,3203.5) 3978,3068.5 3978,2208 4489,1697 v1(4489,1677)
INSIDE_B80: TH3.40@4946.46,1787.5 V6.IVCC0 ZIF.81 | length 2533.5
  Top Layer w7: V6.IVCC0@4684.84,1541.14 v1(4684.84,1646) ; TH3.40@4946.46,1787.5 v1(5020.83,1787.5)
  Bottom Layer w7: ZIF.81@3337.5,2237.5 3452.5,2237.5 3859,1831 4880,1831 ; v1(4684.84,1646) 4684.84,1606.16 4720,1571 4748,1571 4827,1650 4881,1650 4905,1674 4905,1806 4880,1831 ; v1(5020.83,1787.5) 4977.33,1831 4880,1831
INSIDE_B81: TH3.39@4946.46,1887.5 V6.IVCC1 ZIF.82 | length 2468
  Top Layer w7: V6.IVCC1@4736.02,1541.14 v1(4736.02,1610) ; v1(4852.09,1927.5) 4852.09,1920 4884.59,1887.5 TH3.39@4946.46,1887.5
  Mid-Layer 1 w7: ZIF.82@3337.5,2337.5 4780.5,2337.5 4857,2261 4857,2116 4843,2102 4843,1936.59 v1(4852.09,1927.5)
  Mid-Layer 2 w7: v1(4736.02,1610) 4777,1610 4817,1650 4817,1892.41 v1(4852.09,1927.5)
INSIDE_B82: TH3.38@4946.46,1987.5 V6.IVCC2 ZIF.83 | length 2897.3
  Top Layer w7: v1(4761.61,1478) V6.IVCC2@4761.61,1541.14 ; TH3.38@4946.46,1987.5 5000,1987.5 5020.83,1966.67 v1(5020.83,1947.5)
  Mid-Layer 1 w7: ZIF.83@3337.5,2437.5 4888.61,2437.5 5013.5,2312.61 5031.73,2312.61 5051,2293.34 5051,2017.67 5020.83,1987.5 v1(5020.83,1947.5)
  Bottom Layer w7: v1(4761.61,1478) 5049.33,1765.71 5049.33,1801.67 5020.83,1830.17 v1(5020.83,1947.5)
INSIDE_B83: TH3.37@4946.46,2087.5 V6.IVCC3 ZIF.84 | length 2412.1
  Top Layer w7: V6.IVCC3@4787.2,1541.14 v1(4787.2,1670) ; v1(4872.09,2087.5) TH3.37@4946.46,2087.5
  Mid-Layer 2 w7: v1(4787.2,1670) 4798,1680.8 4798,2013.41 v1(4872.09,2087.5)
  Bottom Layer w7: ZIF.84@3337.5,2537.5 3830,2045 4800,2045 4811,2056 4840.59,2056 v1(4872.09,2087.5)
INSIDE_B84: TH3.36@4946.46,2187.5 V6.IVCC4 ZIF.85 | length 3080.1
  Top Layer w7: V6.IVCC4@4812.8,1541.14 4812.8,1478.2 v1(4813,1478) ; TH3.36@4946.46,2187.5 v1@5020.5,2187.5 ; v1(5021,2188) v1@5020.5,2187.5 ; v1(5021,2275) 5020.5,2188 v1@5020.5,2187.5
  Mid-Layer 1 w7: ZIF.85@3237.5,2237.5 3193,2282 3193,2359 3215,2381 3969,2381 3992,2358 4834,2358 4846,2346 4950,2346 v1(5021,2275)
  Bottom Layer w7: v1(4813,1478) 5066.33,1731.33 5066.33,1833 5051,1848.33 5051,2158 v1(5021,2188)
INSIDE_B85: TH3.35@4946.46,2287.5 V6.IVCC5 ZIF.86 | length 3003.5
  Top Layer w7: v1(4823,2238) 4872.5,2287.5 ; V6.IVCC5@4838.39,1541.14 v1(4838.39,1620) ; v1(4843,2317) 4872.5,2287.5 ; TH3.35@4946.46,2287.5 4872.5,2287.5
  Mid-Layer 1 w7: ZIF.86@3237.5,2337.5 3281,2294 3281,2220 3320,2181 3662,2181 3719,2238 v1(4823,2238)
  Mid-Layer 2 w7: v1(4838.39,1620) 4900.5,1620 4920.5,1640 4920.5,2406.5 4853,2410 4843,2400 v1(4843,2317)
INSIDE_B86: TH3.34@4946.46,2387.5 V6.IVCC6 ZIF.87 | length 3042.7
  Top Layer w7: V6.IVCC6@4863.98,1541.14 4863.98,1498.02 v1(4884,1478) ; TH3.34@4946.46,2387.5 5000,2387.5 ; v1(5021,2347.5) 5021,2367.5 5000,2387.5 ; v1(5021,2458) 5021,2408.5 5000,2387.5
  Mid-Layer 1 w7: ZIF.87@3237.5,2437.5 3268.5,2437.5 3312,2481 4114,2481 4137,2458 v1(5021,2458)
  Bottom Layer w7: v1(4884,1478) 5084,1678 5084,2284.5 v1(5021,2347.5)
INSIDE_B87: TH3.33@4946.46,2487.5 V6.IVCC7 ZIF.88 | length 4034.9
  Top Layer w7: v1(4872,1688) 4889.57,1670.43 4889.57,1578.7 V6.IVCC7@4889.57,1541.14 ; v1(4872,2378) 4872,2460 4899.5,2487.5 TH3.33@4946.46,2487.5
  Mid-Layer 2 w7: v1(4872,1688) 4902,1718 4902,2348 v1(4872,2378)
  Bottom Layer w7: ZIF.88@3237.5,2537.5 3194,2494 2820,2494 2793,2467 2793,2307.53 2819.53,2281 3159.53,2281 3181,2259.53 3181,2209.53 3197.53,2193 3395,2193 3847,1741 4819,1741 v1(4872,1688)
INSIDE_B88: TH3.32@4946.46,2587.5 V5.IVCC0 ZIF.89 | length 3754.7
  Top Layer w7: TH3.32@4946.46,2587.5 5000.83,2587.5 v1(5020.83,2567.5) ; V5.IVCC0@5084.84,1541.14 5084.84,1625.84 v1(5085,1626)
  Mid-Layer 1 w7: ZIF.89@3137.5,2337.5 3137.5,2303.5 3193,2248 3193,2115 3220,2088 3637,2088 3866,1859 5138,1859 5174,1823 5174,1650.5 5159.5,1636 5095,1636 v1(5085,1626)
  Mid-Layer 2 w7: v1(5020.83,2567.5) 5085,2503.33 v1(5085,1626)
INSIDE_B89: TH3.31@4946.46,2687.5 V5.IVCC1 ZIF.90 | length 3358.8
  Top Layer w7: v1(4842.5,2745) 4900,2687.5 ; v1(4872,2686) 4873.5,2687.5 4900,2687.5 ; TH3.31@4946.46,2687.5 4900,2687.5 ; V5.IVCC1@5136.02,1541.14 v1(5136.02,1604)
  Mid-Layer 1 w7: v1(4872,2686) 4872,2651 5209,2314 5209,1622.5 5190.5,1604 v1(5136.02,1604)
  Bottom Layer w7: ZIF.90@3137.5,2437.5 3174.5,2437.5 3225,2488 3262,2488 3293,2519 3293,2559 3315,2581 3631,2581 3795,2745 v1(4842.5,2745)
INSIDE_B90: TH3.30@4946.46,2787.5 V5.IVCC2 ZIF.91 | length 4784.3
  Top Layer w7: TH3.30@4946.46,2787.5 TH3.30@4966,2787.5 ; v1(5040,2787.5) TH3.30@4966,2787.5 ; v1(5040.25,2861.75) TH3.30@4966,2787.5 ; v1(5142,1478) 5161.61,1497.61 V5.IVCC2@5161.61,1541.14
  Mid-Layer 2 w7: v1(5040,2787.5) 5046,2793.5 5046,3050 5029,3067 5001,3067 4987,3053 4987,1633 v1(5142,1478)
  Bottom Layer w7: ZIF.91@3137.5,2537.5 3171,2537.5 3221.5,2588 3262.47,2588 3294,2619.53 3294,2659.53 3315.47,2681 3482,2681 3614,2813 3952,2813 4169,3030 4775,3030 4958,3213 5000,3213 5046,3167 5046,2867.5 v1(5040.25,2861.75)
INSIDE_B91: TH3.29@4946.46,2887.5 V5.IVCC3 ZIF.92 | length 4260.5
  Top Layer w7: TH3.29@4946.46,2887.5 4946.46,2912.46 4960,2926 5024,2926 5070,2880 5070,1767.2 5187.2,1650 5174.41,1637.21 ; v1(5145,1666.62) 5174.41,1637.21 ; V5.IVCC3@5187.2,1541.14 5187.2,1624.42 5174.41,1637.21
  Mid-Layer 1 w7: ZIF.92@3037.5,2337.5 3088,2287 3088,2112.53 3119.53,2081 3159.53,2081 3181,2059.53 3181,1919.53 3258.53,1842 5103,1842 5145,1800 v1(5145,1666.62)
INSIDE_B92: TH3.28@4946.46,2987.5 V5.IVCC4 ZIF.93 | length 4049.4
  Top Layer w7: TH3.28@4946.46,2987.5 4991.5,2987.5 5015.75,3011.75 v1(5015.75,3037.25) ; v1(5193,1478) 5212.8,1497.8 V5.IVCC4@5212.8,1541.14
  Mid-Layer 1 w7: ZIF.93@3037.5,2537.5 3088,2588 3262.47,2588 3294,2619.53 3294,2659.53 3315.47,2681 3476,2681 3724,2929 4424,2929 4545,3050 5003,3050 v1(5015.75,3037.25)
  Mid-Layer 2 w7: v1(5015.75,3037.25) 5010,3031.5 5010,2741 5213,2538 5213,1498 v1(5193,1478)
INSIDE_B93: TH3.27@4946.46,3087.5 V5.IVCC5 ZIF.94 | length 4138.6
  Top Layer w7: v1(4872,3021) 4872,3060 4899.5,3087.5 TH3.27@4946.46,3087.5 5064,3087.5 5115.5,3036 5115.5,1753.5 5238.39,1630.61 V5.IVCC5@5238.39,1541.14
  Mid-Layer 1 w7: ZIF.94@2937.5,2337.5 2987,2387 3061.47,2387 3094.47,2420 3094.47,2460 3115,2480.53 3277.47,2480.53 3294.47,2497.53 3294.47,2560 3316.47,2582 3598,2582 3862,2846 4378,2846 4553,3021 v1(4872,3021)
INSIDE_B94: TH3.26@4946.46,3187.5 V5.IVCC6 ZIF.95 | length 4880.8
  Top Layer w7: TH3.26@4946.46,3187.5 4991.5,3187.5 4991.5,3162 v1(5015.75,3137.75) ; v1(5244,1478) 5263.98,1497.98 V5.IVCC6@5263.98,1541.14
  Mid-Layer 1 w7: ZIF.95@2837.5,2337.5 2887,2288 2966,2288 2993,2261 2993,2110 3022,2081 3054.85,2081 3086.41,2049.44 3086.41,1880 3148.41,1818 3899.53,1818 4062.6,1654.93 4117.39,1654.93 4231.33,1541 5181,1541 v1(5244,1478)
  Mid-Layer 2 w7: v1(5015.75,3137.75) 5244,2909.5 v1(5244,1478)
INSIDE_B95: TH3.25@4946.46,3287.5 V5.IVCC7 ZIF.96 | length 4242.9
  Top Layer w7: v1(4872,3229) 4872,3260 4899.5,3287.5 TH3.25@4946.46,3287.5 5087,3287.5 5149,3225.5 5149,1749 5289.57,1608.43 V5.IVCC7@5289.57,1541.14
  Bottom Layer w7: ZIF.96@2837.5,2937.5 2888,2988 3956,2988 4197,3229 v1(4872,3229)
INSIDE_B96: TH2.40 V4.IVCC0 ZIF.97 | length 2254.4
  Top Layer w7: v1(1478.58,1625.16) 1478.58,1596.58 1490,1585.16 V4.IVCC0@1541.14,1585.16 1577,1585.16 1671.84,1680 1765.84,1680 1787.5,1658.34 TH2.40@1787.5,1528.54
  Mid-Layer 1 w7: v1(1478.58,1625.16) 1565.09,1538.65 1565.09,1498.65 1570.74,1493 1610,1493 1637,1520 1637,1642 1958,1963 2763,1963 ZIF.97@2837.5,2037.5
INSIDE_B97: TH2.39 V4.IVCC1 ZIF.98 | length 2502.7
  Top Layer w7: v1(1478,1554) 1498.02,1533.98 V4.IVCC1@1541.14,1533.98 ; TH2.39@1887.5,1528.54 1887.5,1608.5 v1@1913,1634
  Mid-Layer 1 w7: v1(1478,1554) 1485,1554 1580,1459 1827.5,1459 ; v1(1910.3,1636.7) 1910.3,1475.3 1894,1459 1827.5,1459 ; ZIF.98@2937.5,2037.5 2813,1913 1937.5,1913 1677.5,1653 1677.5,1609 1827.5,1459
INSIDE_B98: TH2.38 V4.IVCC2 ZIF.99 | length 2348.9
  Top Layer w7: V4.IVCC2@1541.14,1508.39 1583.7,1508.39 v1(1603.7,1528.39) ; v1(1987,1603) 1987.5,1602.5 TH2.38@1987.5,1528.54
  Mid-Layer 1 w7: v1(1603.7,1528.39) 1617,1541.68 1617,1725.4 1973.6,2082 2993,2082 ZIF.99@3037.5,2037.5
  Bottom Layer w7: v1(1603.7,1528.39) 1697.68,1528.39 1772.29,1603 v1(1987,1603)
INSIDE_B99: TH2.37 V4.IVCC3 ZIF.100 | length 2426
  Top Layer w7: v1(1478,1482.8) V4.IVCC3@1541.14,1482.8 ; v1(2087.5,1434) TH2.37@2087.5,1528.54 2087.5,1844.5 v1(2127,1884)
  Mid-Layer 1 w7: v1(1478,1482.8) 1448,1452.8 1448,1355 1460,1343 1597.18,1343 1662.85,1408.67 2062.17,1408.67 v1(2087.5,1434)
  Bottom Layer w7: v1(2127,1884) 2984,1884 ZIF.100@3137.5,2037.5
INSIDE_B100: TH2.36 V4.IVCC4 ZIF.101 | length 2072
  Top Layer w7: V4.IVCC4@1541.14,1457.2 1692,1457.2 v1(1727,1492.2) ; v1(2187,1603) v1@2187.5,1602.5 ; TH2.36@2187.5,1528.54 v1@2187.5,1602.5 ; v1(2227.5,1746.5) 2187.5,1706.5 v1@2187.5,1602.5
  Bottom Layer w7: v1(1727,1492.2) 1787,1552.2 2136.2,1552.2 v1(2187,1603) ; v1(2227.5,1746.5) 2239.5,1758.5 2958.5,1758.5 ZIF.101@3237.5,2037.5
INSIDE_B101: TH2.35 V4.IVCC5 ZIF.102 | length 2359.8
  Top Layer w7: v1(1478,1432) 1478.39,1431.61 V4.IVCC5@1541.14,1431.61 ; v1(2287,1454) 2287.5,1454.5 TH2.35@2287.5,1528.54 v1(2287.5,1713)
  Bottom Layer w7: v1(1478,1432) 1481,1435 1638.66,1435 1680.66,1393 2226,1393 v1(2287,1454) ; v1(2287.5,1713) 3013,1713 ZIF.102@3337.5,2037.5
INSIDE_B102: TH2.34 V4.IVCC6 ZIF.103 | length 2459.8
  Top Layer w7: V4.IVCC6@1541.14,1406.02 v1(1604,1406) ; v1(2387.5,1454) TH2.34@2387.5,1528.54 v1(2387.5,1603.5)
  Bottom Layer w7: v1(1604,1406) 1638,1372 2305.5,1372 v1(2387.5,1454) ; v1(2387.5,1603.5) 2343,1648 2160.5,1648 2097,1711.5 2097,1903 2120,1926 2714,1926 2788,2000 2788,2088 ZIF.103@2837.5,2137.5
INSIDE_B103: TH2.33 V4.IVCC7 ZIF.104 | length 3261.3
  Top Layer w7: v1(1478.58,1380.43) V4.IVCC7@1541.14,1380.43 ; TH2.33@2487.5,1528.54 2487.5,1454.5 v1(2488,1454)
  Mid-Layer 1 w7: v1(1478.58,1380.43) 1507,1408.85 ; v1(2488,1454) 2432,1510 2026,1510 1943,1427 1623.3,1427 1615.8,1434.5 1592.2,1434.5 1584.7,1427 1525.15,1427 1507,1408.85 ; ZIF.104@2937.5,2137.5 2887,2188 1946.82,2188 1449,1690.18 1449,1541 1477,1513 1495,1513 1507,1501 1507,1408.85
INSIDE_B104: TH2.32 V3.IVCC0 ZIF.105 | length 3625.6
  Top Layer w7: v1(1479,1205) 1498.84,1185.16 V3.IVCC0@1541.14,1185.16 ; TH2.32@2587.5,1528.54 v1(2587.5,1602.91)
  Mid-Layer 1 w7: v1(1479,1205) 1449,1175 1449,1136 1461,1124 1504,1124 1569,1189 1678,1189 1863,1374 2579,1374 2595,1390 2595,1595.41 v1(2587.5,1602.91)
  Bottom Layer w7: v1(2587.5,1602.91) 2505.91,1684.5 2270,1684.5 2258,1696.5 2258,1729.5 2270,1741.5 3007.5,1741.5 3282,2016 3282,2059 3260,2081 3222,2081 3182,2121 3182,2159 3160,2181 3081,2181 ZIF.105@3037.5,2137.5
INSIDE_B105: TH2.31 V3.IVCC1 ZIF.106 | length 3389.5
  Top Layer w7: v1(1478,1154) 1498.02,1133.98 V3.IVCC1@1541.14,1133.98 ; v1(2563.5,1405) 2583.5,1405 TH2.31@2687.5,1509 ; v1(2687.5,1445) TH2.31@2687.5,1509 ; TH2.31@2687.5,1528.54 TH2.31@2687.5,1509
  Mid-Layer 1 w7: v1(1478,1154) 1541.87,1217.87 1658.87,1217.87 1832.67,1391.67 2550.17,1391.67 v1(2563.5,1405)
  Bottom Layer w7: v1(2687.5,1445) 2465,1667.5 2255.5,1667.5 2190,1733 2190,1753 2214,1777 2945,1777 3181,2013 3181,2094 ZIF.106@3137.5,2137.5
INSIDE_B106: TH2.30 V3.IVCC2 ZIF.107 | length 2553.7
  Top Layer w7: V3.IVCC2@1541.14,1108.39 1584.39,1108.39 v1(1604,1128) ; v1(2787.5,1450) TH2.30@2787.5,1528.54 2787.5,1602.5 v1(2788,1603)
  Mid-Layer 1 w7: v1(1604,1128) 1646,1128 1874,1356 2693.5,1356 v1(2787.5,1450)
  Bottom Layer w7: v1(2788,1603) 3009,1603 3382,1976 3382,2066 3360,2088 3287,2088 ZIF.107@3237.5,2137.5
INSIDE_B107: TH2.29 V3.IVCC3 ZIF.108 | length 2889.8
  Top Layer w7: v1(1478,1083) 1478.2,1082.8 V3.IVCC3@1541.14,1082.8 ; v1(2887.5,1336) v1(2887.5,1454) TH2.29@2887.5,1528.54
  Bottom Layer w7: v1(1478,1083) 1445,1116 1445,1312.5 1460.5,1328 1496,1328 1517.5,1306.5 1684,1306.5 1713.5,1336 v1(2887.5,1336) ; v1(2887.5,1454) 3399,1965.5 3399,2076 ZIF.108@3337.5,2137.5
INSIDE_B108: TH2.28 V3.IVCC4 ZIF.109 | length 2531
  Top Layer w7: V3.IVCC4@1541.14,1057.2 v1(1722.8,1057.2) ; ZIF.109@2837.5,2237.5 2794,2194 2794,2010.47 2987.5,1816.97 TH2.28@2987.5,1528.54 2987.5,1408 v1(2967.5,1388)
  Mid-Layer 1 w7: v1(1722.8,1057.2) 2656.7,1057.2 2967.5,1368 v1(2967.5,1388)
INSIDE_B109: TH2.27 V3.IVCC5 ZIF.110 | length 3585.2
  Top Layer w7: v1(1442.18,1021.93) 1451.87,1031.61 V3.IVCC5@1541.14,1031.61 ; v1(3067,1454) 3087.5,1474.5 ; v1(3067.5,1378) 3087.5,1398 3087.5,1474.5 ; TH2.27@3087.5,1528.54 3087.5,1474.5
  Mid-Layer 1 w7: v1(1442.18,1021.93) 1442.18,959.13 1460,941.32 2842.82,941.32 2942.5,1041 2942.5,1253 v1(3067.5,1378)
  Mid-Layer 2 w7: ZIF.110@2937.5,2237.5 2893,2282 2716.47,2282 2694.47,2260 2694.47,2213.53 2720,2188 2774,2188 2782,2180 2782,2126 2814,2094 2867.53,2094 2881,2080.53 2881,1890 3067,1704 v1(3067,1454)
INSIDE_B110: TH2.26 V3.IVCC6 ZIF.111 | length 2810.8
  Top Layer w7: V3.IVCC6@1541.14,1006.02 v1(1604,1006.02) ; ZIF.111@3037.5,2237.5 2993,2193 2993,2097 3008,2082 3059,2082 3088,2053 3088,1835.5 3187.5,1736 TH2.26@3187.5,1528.54 v1(3187.5,1380)
  Mid-Layer 1 w7: v1(1604,1006.02) 2639.02,1006.02 3041,1408 3159.5,1408 v1(3187.5,1380)
INSIDE_B111: TH2.25 V3.IVCC7 ZIF.112 | length 2964.8
  Top Layer w7: v1(1478,972) 1486.43,980.43 V3.IVCC7@1541.14,980.43 ; ZIF.112@3137.5,2237.5 3193,2182 3279.53,2182 3287.5,2174.03 TH2.25@3287.5,1528.54 3287.5,1466.48 v1(3246.02,1425)
  Mid-Layer 1 w7: v1(1478,972) 1526,972 1890,1336 2802,1336 2891,1425 v1(3246.02,1425)
INSIDE_B112: TH3.40@1787.5,528.54 V2.IVCC0 ZIF.113 | length 2182.8
  Top Layer w7: v1(1479,805) 1498.84,785.16 V2.IVCC0@1541.14,785.16 ; v1(1769.75,623) 1787.5,607.92 ; TH3.40@1787.5,528.54 1787.5,607.92 ; ZIF.113@2237.5,2037.5 1823.1,1623.1 1823.1,1164.9 1856.5,1131.5 1856.5,676.92 1787.5,607.92
  Mid-Layer 1 w7: v1(1479,805) 1587.75,805 v1(1769.75,623)
INSIDE_B113: TH3.39@1887.5,528.54 V2.IVCC1 ZIF.114 | length 3071.2
  Top Layer w7: v1(1478.02,734) V2.IVCC1@1541.14,733.98 ; v1(1867,434) 1887.5,454.5 1887.5,480 ; TH3.39@1887.5,528.54 1887.5,480 ; ZIF.114@2337.5,2037.5 2337.5,1761.5 2422,1677 2422,481 2410,469 2352,469 2321,500 2321,582 2254,582 2238,566 2238,480 2182,424 1943.5,424 1887.5,480
  Mid-Layer 2 w7: v1(1478.02,734) 1557,655.02 1557,609 1732,434 v1(1867,434)
INSIDE_B114: TH3.38@1987.5,528.54 V2.IVCC2 ZIF.115 | length 3258.7
  Top Layer w7: V2.IVCC2@1541.14,708.39 v1(1604,708.39) ; v1(1967.5,602.91) 1987.5,582.91 TH3.38@1987.5,528.54
  Mid-Layer 1 w7: v1(1604,708.39) 1604,673 1685,592 1956.59,592 v1(1967.5,602.91)
  Mid-Layer 2 w7: v1(1967.5,602.91) 1967.5,622 2170,824.5 2202.5,824.5 2218,809 2218,715 2139.5,636.5 2139.5,507.5 2124,492 2124,439 2140,423 2391,423 2437.5,469.5 ZIF.115@2437.5,2037.5
INSIDE_B115: TH3.37@2087.5,528.54 V2.IVCC3 ZIF.116 | length 3234.9
  Top Layer w7: v1(1478.2,683) 1478.41,682.8 V2.IVCC3@1541.14,682.8 ; v1(2067,454) 2087.5,474.5 2087.5,480 ; TH3.37@2087.5,528.54 2087.5,480 ; v1(2161,454) 2113.5,454 2087.5,480
  Mid-Layer 2 w7: v1(2161,454) 2236,529 2360,529 2417,586 2417,1988 2393,2012 2393,2161 2420,2188 2466,2188 2493,2161 2493,2121 2537.5,2076.5 ZIF.116@2537.5,2037.5
  Bottom Layer w7: v1(1478.2,683) 1506.98,654.23 1506.98,528.98 1481.5,503.5 1481.5,455 1483.5,453 1818,453 1828,463 2058,463 v1(2067,454)
INSIDE_B116: TH3.36@2187.5,528.54 V2.IVCC4 ZIF.117 | length 2896.6
  Top Layer w7: V2.IVCC4@1541.14,657.2 v1(1664.62,657.2) ; v1(2168,608) 2187.5,588.5 2187.5,576 ; TH3.36@2187.5,528.54 2187.5,576 ; ZIF.117@2637.5,2037.5 2581,2094 2581,2173.47 2560.47,2194 2311.5,2194 2288,2170.5 2288,1960 2154,1826 2154,609.5 2187.5,576
  Bottom Layer w7: v1(1664.62,657.2) 1817.19,657.2 1857.39,617 1927,617 1960,650 2012,650 2054,608 v1(2168,608)
INSIDE_B117: TH3.35@2287.5,528.54 V2.IVCC5 ZIF.118 | length 3775.3
  Top Layer w7: v1(1474.95,631.61) V2.IVCC5@1541.14,631.61 ; TH3.35@2287.5,528.54 v1(2287.5,454) 2287.5,363.5 2329,322 2329,200 2369,160 2710,160 2747,197 2747,2002 2760,2015 ZIF.118@2737.5,2037.5
  Bottom Layer w7: v1(1474.95,631.61) 1464,620.67 1464,440.5 1477.39,427.11 1829.39,427.11 1856.5,400 1884.5,400 1910,425.5 2259,425.5 v1(2287.5,454)
INSIDE_B118: TH3.34@2387.5,528.54 V2.IVCC6 ZIF.119 | length 2542.8
  Top Layer w7: V2.IVCC6@1541.14,606.02 v1(1604,606.02) ; v1(2223,603) 2387.41,603 v1(2387.5,602.91) TH3.34@2387.5,528.54
  Mid-Layer 2 w7: ZIF.119@2237.5,2137.5 2286.64,2088.36 2286.64,1960.36 2358,1889 2358,955 2387.5,925.5 v1(2387.5,602.91)
  Bottom Layer w7: v1(1604,606.02) 1636.02,574 2194,574 v1(2223,603)
INSIDE_B119: TH3.33@2487.5,528.54 V2.IVCC7 ZIF.120 | length 3309.8
  Top Layer w7: v1(1431,560.43) 1451,580.43 V2.IVCC7@1541.14,580.43 ; ZIF.120@2337.5,2137.5 2393,2082 2393,1830 2522,1701 2522,540.54 2510,528.54 TH3.33@2487.5,528.54 v1(2487.5,454)
  Mid-Layer 1 w7: v1(1431,560.43) 1429,558.43 1429,333 1480,282 1638,282 1840,484 2457.5,484 v1(2487.5,454)
INSIDE_B120: TH3.32@2587.5,528.54 V1.IVCC0 ZIF.121 | length 2955.8
  Top Layer w7: v1(1510,483) 1510,385.16 V1.IVCC0@1541.14,385.16 ; TH3.32@2587.5,528.54 2587.5,577.91 v1(2587.5,602.91)
  Mid-Layer 2 w7: ZIF.121@2437.5,2137.5 2487,2088 2487,1934 2622,1799 2622,637.41 v1(2587.5,602.91)
  Bottom Layer w7: v1(1510,483) 2309,483 2428.91,602.91 v1(2587.5,602.91)
INSIDE_B121: TH3.31@2687.5,528.54 V1.IVCC1 ZIF.122 | length 3353.6
  Top Layer w7: v1(1478,394) 1478,369.5 1513.52,333.98 V1.IVCC1@1541.14,333.98 ; ZIF.122@2537.5,2137.5 2493,2093 2493,1833 2722,1604 2722,633 2687.5,598.5 TH3.31@2687.5,528.54 v1(2687.5,454)
  Bottom Layer w7: v1(1478,394) 1488,384 1488,324 1624,188 2421.5,188 v1(2687.5,454)
INSIDE_B122: TH3.30@2787.5,528.54 V1.IVCC2 ZIF.123 | length 3101.6
  Top Layer w7: V1.IVCC2@1541.14,308.39 1584.39,308.39 v1(1604,328) ; TH3.30@2787.5,528.54 v1(2787.5,602.91)
  Mid-Layer 1 w7: v1(1604,328) 1849,573 2757.59,573 v1(2787.5,602.91)
  Mid-Layer 2 w7: ZIF.123@2637.5,2137.5 2593,2093 2593,1863 2818,1638 2818,633.41 v1(2787.5,602.91)
INSIDE_B123: TH3.29@2887.5,528.54 V1.IVCC3 ZIF.124 | length 4241
  Top Layer w7: v1(1459,344) 1459,304 1480.2,282.8 V1.IVCC3@1541.14,282.8 ; v1(2887.5,454) TH3.29@2887.5,528.54
  Mid-Layer 1 w7: v1(1459,344) 1504,299 1630,299 1879,548 3099,548 3157,490 3157,441 3140,424 2917.5,424 v1(2887.5,454)
  Mid-Layer 2 w7: ZIF.124@2737.5,2137.5 2793,2082 2793,1953 3018,1728 3018,584.5 v1(2887.5,454)
INSIDE_B124: TH3.28@2987.5,528.54 V1.IVCC4 ZIF.125 | length 3468.5
  Top Layer w7: V1.IVCC4@1541.14,257.2 1605.8,257.2 v1(1636,227) ; TH3.28@2987.5,528.54 2987.5,577.91 v1(2987.5,602.91)
  Mid-Layer 2 w7: ZIF.125@2637.5,2237.5 2682,2193 2682,1995 2938,1739 2938,1079 2987.5,1029.5 v1(2987.5,602.91)
  Bottom Layer w7: v1(1636,227) 1777.67,368.67 1900.17,368.67 1939.5,408 2298,408 2458,568 2952.59,568 v1(2987.5,602.91)
INSIDE_B125: TH3.27@3087.5,528.54 V1.IVCC5 ZIF.126 | length 3981.9
  Top Layer w7: v1(1478.39,231.61) V1.IVCC5@1541.14,231.61 ; TH3.27@3087.5,528.54 3087.5,474.17 3107.5,454.17 v1(3127.5,454.17)
  Mid-Layer 1 w7: v1(1478.39,231.61) 1510.77,264 1669,264 1790.67,385.67 2550.67,385.67 2686,521 3040.67,521 3107.5,454.17 v1(3127.5,454.17)
  Mid-Layer 2 w7: ZIF.126@2737.5,2237.5 2768.28,2237.5 2818.78,2187 2865,2187 2892,2160 2892,2097.53 2908.53,2081 2959.53,2081 2981,2059.53 2981,1876.14 3127.5,1729.64 v1(3127.5,454.17)
INSIDE_B126: TH3.26@3187.5,528.54 V1.IVCC6 ZIF.127 | length 4695.6
  Top Layer w7: V1.IVCC6@1541.14,206.02 1599.98,206.02 1618,188 1638.98,188 v1(1697,246.02) ; ZIF.127@2537.5,2937.5 2593,2882 2593,2415 2620,2388 2865,2388 2892,2361 2892,1942 3146,1688 3146,617.5 3187.5,576 ; TH3.26@3187.5,528.54 3187.5,576 ; v1(3187.5,618) 3187.5,576
  Bottom Layer w7: v1(1697,246.02) 1801.98,351 2451,351 2629,529 3098.5,529 v1(3187.5,618)
INSIDE_B127: TH3.25@3287.5,528.54 V1.IVCC7 ZIF.128 | length 4749.5
  Top Layer w7: v1(1478,180) 1478.43,180.43 V1.IVCC7@1541.14,180.43 ; ZIF.128@2937.5,2937.5 2993,2882 3080,2882 3087,2875 3087,2097.53 3103.53,2081 3159.53,2081 3181,2059.53 3181,1801.59 3242,1740.59 3242,1492 3215,1465 3215,1394 3322,1287 3322,614 3287.5,579.5 TH3.25@3287.5,528.54 v1(3287.5,454)
  Mid-Layer 1 w7: v1(1478,180) 1666,180 1689.22,203.22 3036.72,203.22 v1(3287.5,454)
NetOB1_U_OB_WRP16_DS: OB16.DS
OB_D_B0: OB16.D0 S7.DATA0 V14.OVL0 | length 1266.5
  Top Layer w7: V14.OVL0@4166.14,4684.84 4251.16,4684.84 v1(4271,4665) ; v1(4629,4722) 4660,4722 4683.27,4745.27 S7.DATA0@4683.27,4788.62 4683.27,4877.92 4760,4954.65 v1(4760,5003)
  Mid-Layer 1 w7: v1(4271,4665) 4300.5,4665 4343,4707.5 4343,4840 4385.2,4882.2 4457.63,4882.2 4538.38,4962.94 4571,4962.94 4614.06,5006 4757,5006 v1(4760,5003)
  Bottom Layer w7: v1(4629,4722) 4629,4742 4650.02,4763.02 OB16.D0@4691.14,4763.02
OB_D_B1: OB16.D1 S7.DATA1 V14.OVL1 | length 1154.2
  Top Layer w7: V14.OVL1@4166.14,4736.02 v1(4229,4736) ; v1(4520,4544.24) 4714.76,4739 S7.DATA1@4714.76,4788.62
  Mid-Layer 2 w7: v1(4520,4544.24) 4555.24,4509 4628.5,4509 4679.5,4560 4679.5,4580 4565.5,4694 v1(4541,4694)
  Bottom Layer w7: v1(4229,4736) 4271,4694 4349,4694 4392.43,4737.43 OB16.D1@4458.86,4737.43 4497.57,4737.43 v1(4541,4694)